# Altium PCB PCB_JK-BLDC-Encoder-Calibrator-Tester4_2023-05-02.pcbdoc
Units mm, origin at the board's own origin, x right, y up, seen from the top; angles counter-clockwise.
Board outline 118.08 x 76.87 mm, 2 copper layers (Top Layer, Bottom Layer); 17 components, 64 nets, 153 pads, 5 vias.
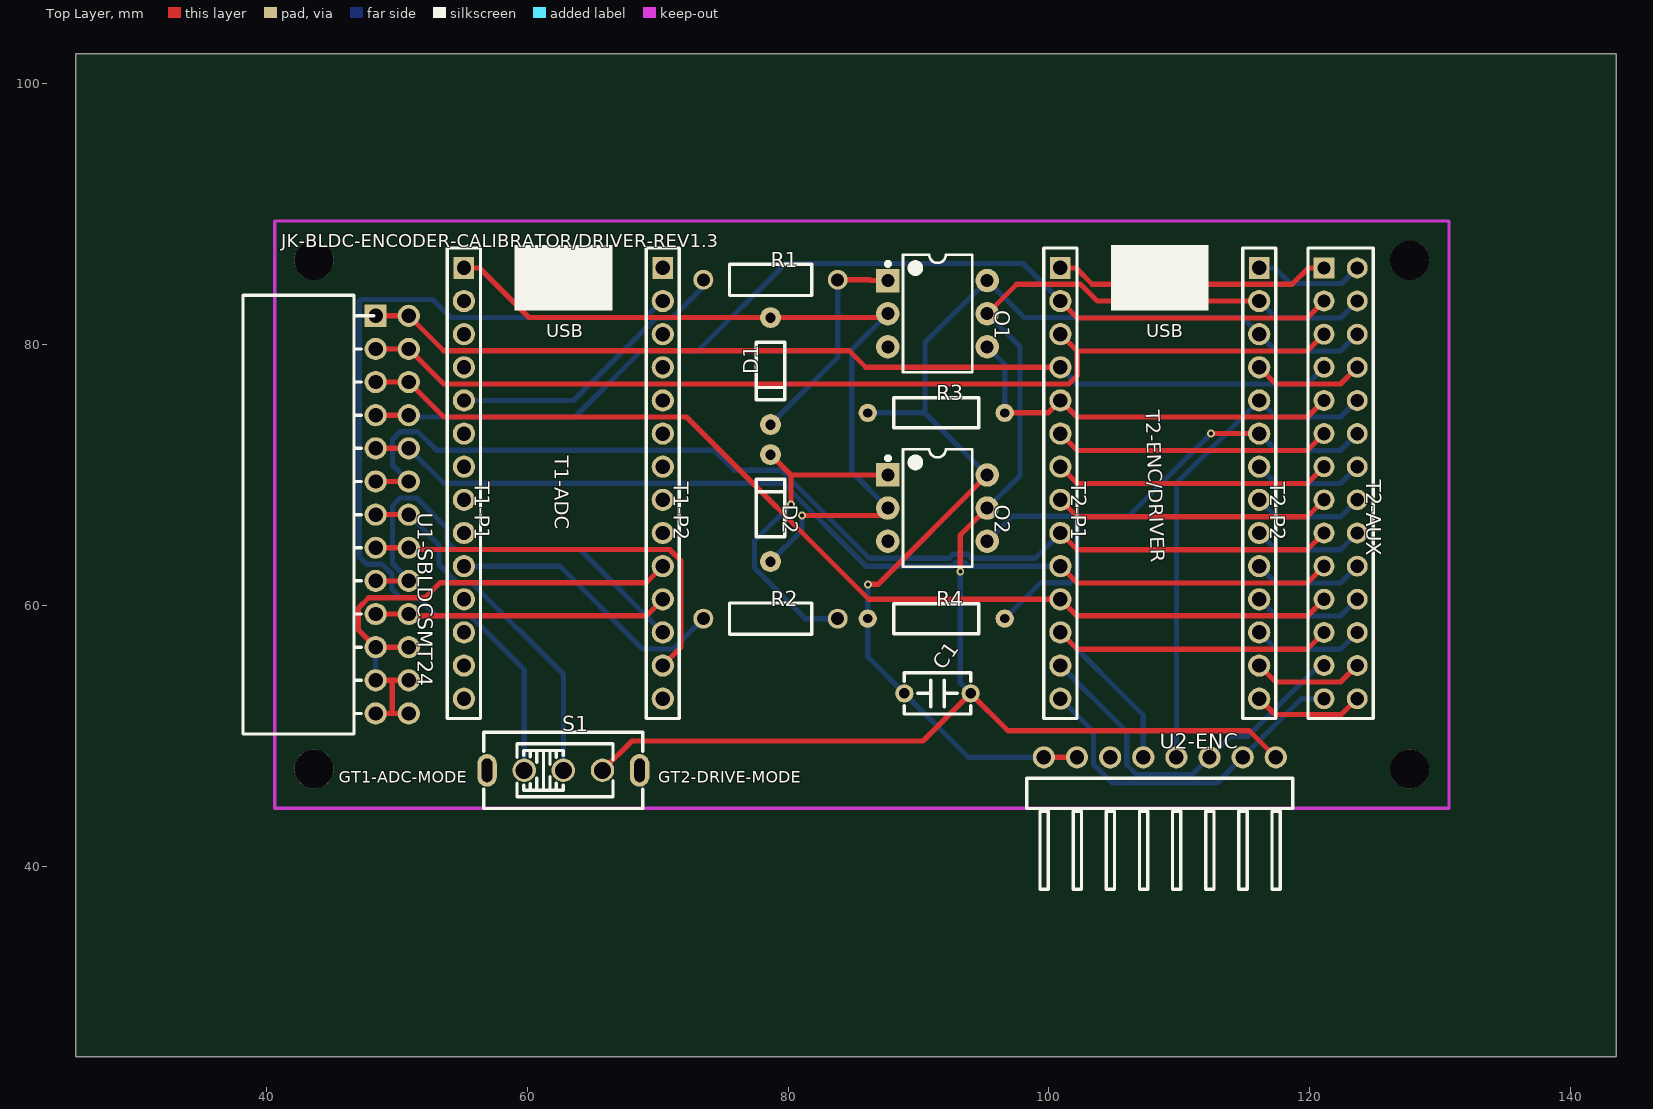
[diagram p0: Top Layer view]
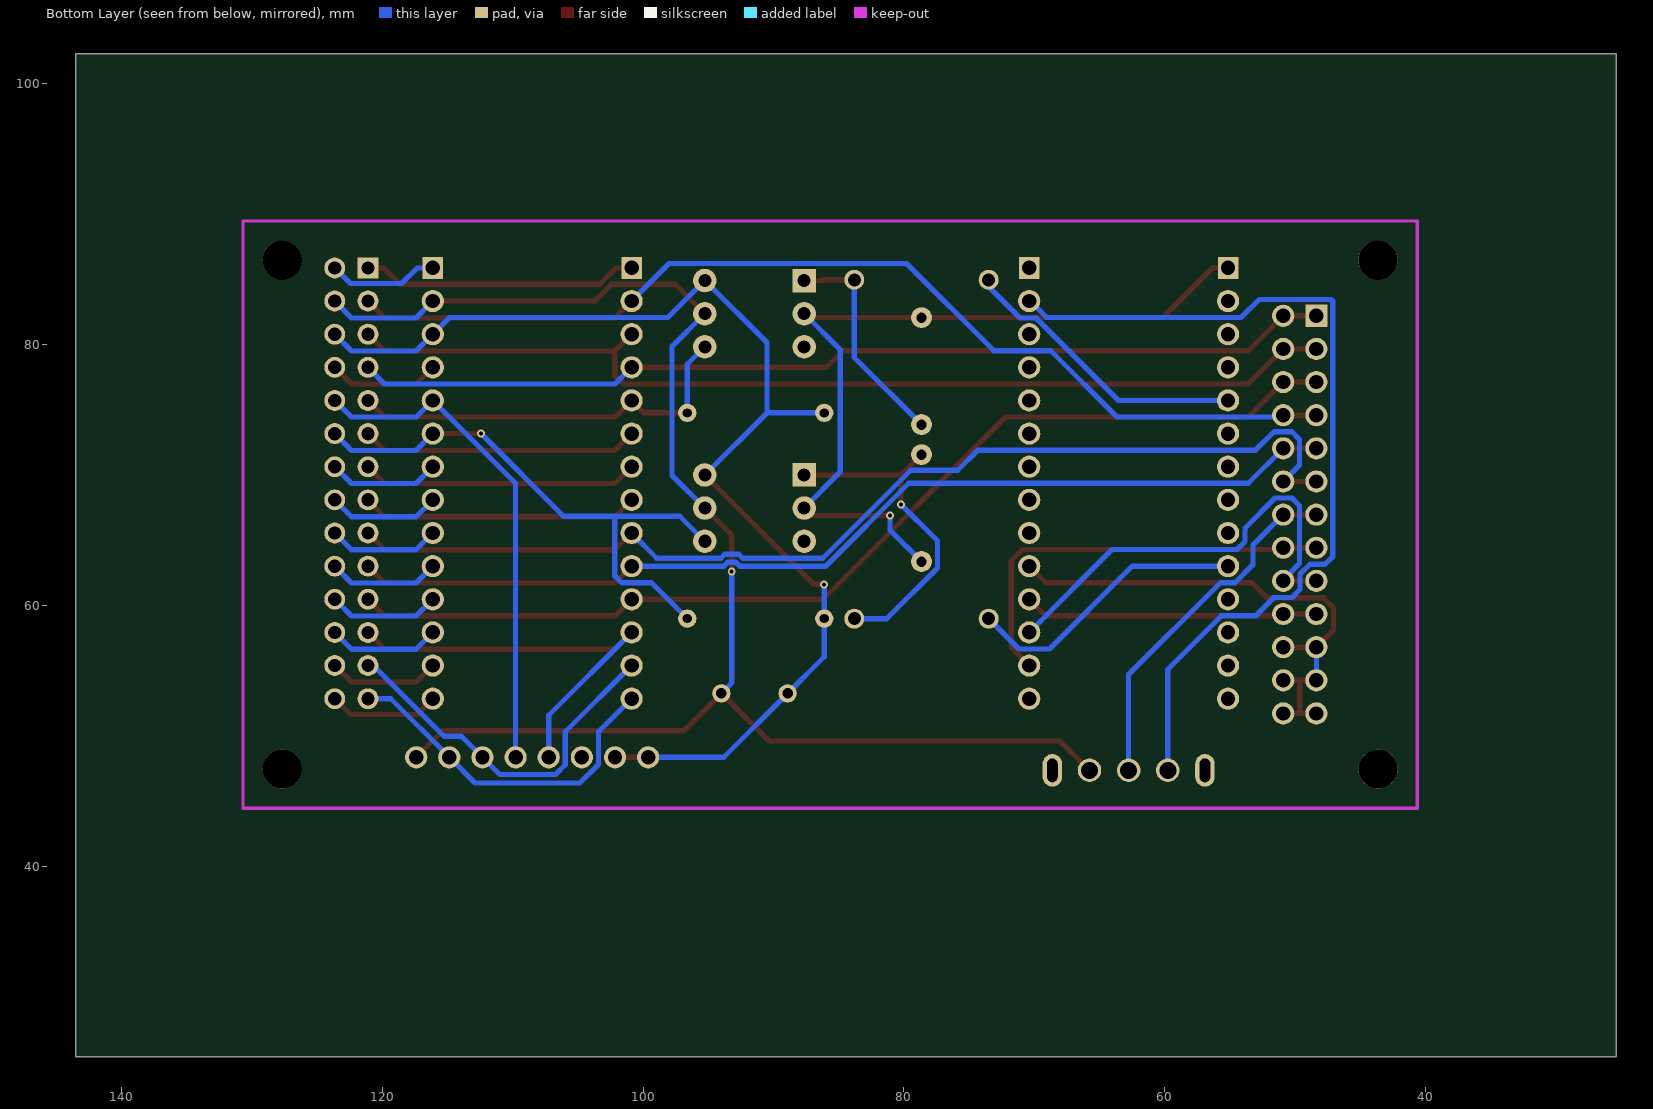
[diagram p1: Bottom Layer view, seen from below]

## Layer stack, top to bottom
Top Layer: signal copper (thickness not stored)
Dielectric: dielectric 0.32, FR-4, Dk 4.8
Bottom Layer: signal copper (thickness not stored)

## Board outline
143.484,25.4 25.4,25.4 25.4,102.271 143.484,102.271

## Components (designator, comment, footprint, x,y, rotation, side; value= is the part's Value field where it differs from the comment)
C1 "100nF" CAP-TH_L5.0-W2.5-P5.08-D0.7 91.457,53.244 r0 top
D1 "1N914BTR" DO-35_BD2.0-L4.2-P8.20-D0.5-RD 78.657,77.944 r90 top
D2 "1N914BTR" DO-35_BD2.0-L4.2-P8.20-D0.5-RD 78.657,67.444 r270 top
O1 "H11L1" DIP-6_L8.5-W6.4-P2.54-LS7.6-BL 91.457,82.344 r270 top
O2 "H11L1" DIP-6_L8.5-W6.4-P2.54-LS7.6-BL 91.457,67.444 r270 top
R1 "220" RES-TH_BD2.4-L6.3-P10.30-D0.6 78.657,84.944 r0 top
R2 "220" RES-TH_BD2.4-L6.3-P10.30-D0.6 78.657,58.969 r0 top
R3 "1kΩ" RES-TH_BD2.3-L6.5-P10.50-D0.5 91.357,74.744 r0 top
R4 "1kΩ" RES-TH_BD2.3-L6.5-P10.50-D0.5 91.357,58.969 r0 top
S1 "SS-12F44-G5_C2998807" SW-TH_SS-12F44-G5_C2998807 62.777,47.344 r0 top
T1-P1 "PM254-1-14-Z-8.5" HDR-TH_14P-P2.54-V-F-1 55.157,69.344 r270 top
T1-P2 "PM254-1-14-Z-8.5" HDR-TH_14P-P2.54-V-F-1 70.397,69.344 r270 top
T2-AUX "PM254-2-14-Z-8.5" HDR-TH_28P-P2.54-V-F-R2-C14-S2.54-1 122.357,69.344 r270 top
T2-P1 "PM254-1-14-Z-8.5" HDR-TH_14P-P2.54-V-F-1 100.877,69.344 r270 top
T2-P2 "PM254-1-14-Z-8.5" HDR-TH_14P-P2.54-V-F-1 116.117,69.344 r270 top
U1-SBLDCSMT24 "PM254-2-13-W-8.5" HDR-TH_26P-P2.54-H-F-R2-C13-W8.5 49.657,66.944 r270 top
U2-ENC "PZ254-1-08-W-8.5" HDR-TH_08P-P2.54-H-M-W10.4-N 108.497,48.344 r0 top

## Footprints (in the part's own frame and the unit in brackets; to place one, negate y for a bottom-side part, rotate by r counter-clockwise, add the part's x,y. Pads: shape width x height; smd on the part's side, far side on the other; paste and mask are expansions set on the pad)
CAP-TH_L5.0-W2.5-P5.08-D0.7 [mm]
  round 1.4 hole 0.8: 1(-2.54,0) 2(2.54,0)
  silkscreen extent -2.54,-1.59 2.54,1.59
DIP-6_L8.5-W6.4-P2.54-LS7.6-BL [mm]
  rect 1.8x1.8 hole 1: 1(-2.54,-3.81)
  round 1.8 hole 1: 2(0,-3.81) 3(2.54,-3.81) 4(2.54,3.81) 5(0,3.81) 6(-2.54,3.81)
  silkscreen extent -4.52,-3.95 4.5,2.65
DO-35_BD2.0-L4.2-P8.20-D0.5-RD [mm]
  round 1.6 hole 0.8: 1(-4.1,0) 2(4.1,0)
  silkscreen extent -2.2,-1.1 2.2,1.1
HDR-TH_08P-P2.54-H-M-W10.4-N [mm]
  round 1.7 hole 1.1: 1(-8.89,0) 2(-6.35,0) 3(-3.81,0) 4(-1.27,0) 5(1.27,0) 6(3.81,0) 7(6.35,0) 8(8.89,0)
  silkscreen extent -10.2,-10.12 10.2,-1.62
HDR-TH_14P-P2.54-V-F-1 [mm]
  rect 1.7x1.575 hole 1.1: 1(-16.51,0)
  round 1.7 hole 1.1: 2(-13.97,0) 3(-11.43,0) 4(-8.89,0) 5(-6.35,0) 6(-3.81,0) 7(-1.27,0) 8(1.27,0) 9(3.81,0) 10(6.35,0) 11(8.89,0) 12(11.43,0) 13(13.97,0) 14(16.51,0)
  silkscreen extent -18.03,-1.27 18.03,1.27
HDR-TH_26P-P2.54-H-F-R2-C13-W8.5 [mm]
  rect 1.7x1.7 hole 1.1: 1(-15.24,-1.27)
  round 1.7 hole 1.1: 2(-15.24,1.27) 3(-12.7,-1.27) 4(-12.7,1.27) 5(-10.16,-1.27) 6(-10.16,1.27) 7(-7.62,-1.27) 8(-7.62,1.27) 9(-5.08,-1.27) 10(-5.08,1.27) 11(-2.54,-1.27) 12(-2.54,1.27) 13(0,-1.27) 14(0,1.27) 15(2.54,-1.27) 16(2.54,1.27) 17(5.08,-1.27) 18(5.08,1.27) 19(7.62,-1.27) 20(7.62,1.27) 21(10.16,-1.27) 22(10.16,1.27) 23(12.7,-1.27) 24(12.7,1.27) 25(15.24,-1.27) 26(15.24,1.27)
  silkscreen extent -16.81,-11.43 16.81,-1.4
HDR-TH_28P-P2.54-V-F-R2-C14-S2.54-1 [mm]
  rect 1.6x1.6 hole 1.02: 1(-16.51,-1.27)
  round 1.6 hole 1.02: 2(-16.51,1.27) 3(-13.97,-1.27) 4(-13.97,1.27) 5(-11.43,-1.27) 6(-11.43,1.27) 7(-8.89,-1.27) 8(-8.89,1.27) 9(-6.35,-1.27) 10(-6.35,1.27) 11(-3.81,-1.27) 12(-3.81,1.27) 13(-1.27,-1.27) 14(-1.27,1.27) 15(1.27,-1.27) 16(1.27,1.27) 17(3.81,-1.27) 18(3.81,1.27) 19(6.35,-1.27) 20(6.35,1.27) 21(8.89,-1.27) 22(8.89,1.27) 23(11.43,-1.27) 24(11.43,1.27) 25(13.97,-1.27) 26(13.97,1.27) 27(16.51,-1.27) 28(16.51,1.27)
  silkscreen extent -18.03,-2.5 18.03,2.5
RES-TH_BD2.3-L6.5-P10.50-D0.5 [mm]
  round 1.4 hole 0.7: 1(-5.25,0) 2(5.25,0)
  silkscreen extent -3.25,-1.15 3.25,1.15
RES-TH_BD2.4-L6.3-P10.30-D0.6 [mm]
  round 1.524 hole 1: 1(-5.15,0) 2(5.15,0)
  silkscreen extent -3.15,-1.2 3.15,1.2
SW-TH_SS-12F44-G5_C2998807 [mm]
  round 1.8 hole 1.3: 1(-3,0) 2(0,0) 3(3,0)
  oval 1.5x2.5 hole 0.8 slot 1.8 at 90 deg: 4(5.85,0) 5(-5.85,0)
  silkscreen extent -6.1,-2.92 6.1,2.92

## Free pads (board coordinates)
  round 3 hole 3 unplated: ""(43.657,47.444) ""(43.657,86.444) ""(127.657,47.444) ""(127.657,86.444)

## Via types
v1: diameter 0.61, hole 0.305, Top Layer to Bottom Layer, tented both sides, 5 vias

## Nets (pads, with @x,y where several pads share a name; then routed paths per layer and width w, separated by ;. In a path a pad name is that pad's centre, name@x,y a point inside that pad or via, vN(x,y) a via of type N, cw(c..) or ccw(c..) an arc to the next point about the centre after c; other vN are vias at no path point)
AS5147-XXNC_P3: U2-ENC.3
JK-SBLDC-SMT-REV2.4_P1_03: T1-P2.10 U1-SBLDCSMT24.21 U1-SBLDCSMT24.22 U1-SBLDCSMT24.23 U1-SBLDCSMT24.24 U1-SBLDCSMT24.25 U1-SBLDCSMT24.26 | length 40.9
  Top Layer w0.4: U1-SBLDCSMT24.25 49.657,51.704 ; U1-SBLDCSMT24.23 49.657,54.244 ; U1-SBLDCSMT24.26 49.657,51.704 ; U1-SBLDCSMT24.24 49.657,54.244 ; U1-SBLDCSMT24.22 U1-SBLDCSMT24.21 47.076,58.095 47.076,59.789 47.863,60.575 52.183,60.575 53.331,61.724 69.127,61.724 T1-P2.10 ; 49.657,51.704 49.657,54.244
  Bottom Layer w0.4: U1-SBLDCSMT24.23 U1-SBLDCSMT24.21
JK-SBLDC-SMT-REV2.4_P1_04: T1-P2.11 U1-SBLDCSMT24.19 U1-SBLDCSMT24.20 | length 22.6
  Top Layer w0.4: U1-SBLDCSMT24.19 U1-SBLDCSMT24.20 51.067,59.184 69.127,59.184 T1-P2.11
JK-SBLDC-SMT-REV2.4_P1_05: T1-P2.12 U1-SBLDCSMT24.17 U1-SBLDCSMT24.18 | length 34.7
  Top Layer w0.4: U1-SBLDCSMT24.17 U1-SBLDCSMT24.18
  Bottom Layer w0.4: U1-SBLDCSMT24.18 50.927,61.943 49.676,63.195 49.676,67.627 50.263,68.214 51.549,68.214 53.868,65.895 53.868,64.865 54.469,64.264 64.047,64.264 T1-P2.12
JK-SBLDC-SMT-REV2.4_P1_06: T1-P2.13 U1-SBLDCSMT24.15 U1-SBLDCSMT24.16 | length 32.4
  Top Layer w0.4: U1-SBLDCSMT24.15 U1-SBLDCSMT24.16 51.067,64.264 70.925,64.264 71.777,63.412 71.777,56.753 T1-P2.13
JK-SBLDC-SMT-REV2.4_P1_07: S1.2 U1-SBLDCSMT24.13 U1-SBLDCSMT24.14 | length 27.7
  Top Layer w0.4: U1-SBLDCSMT24.13 U1-SBLDCSMT24.14
  Bottom Layer w0.4: U1-SBLDCSMT24.14 53.248,64.623 53.248,63.113 54.637,61.724 55.744,61.724 62.777,54.691 S1.2
JK-SBLDC-SMT-REV2.4_P1_08: T2-AUX.17 T2-P1.9 U1-SBLDCSMT24.11 U1-SBLDCSMT24.12 | length 84.1
  Top Layer w0.4: U1-SBLDCSMT24.11 U1-SBLDCSMT24.12 ; T2-P1.9 102.166,64.245 119.798,64.245 T2-AUX.17
  Bottom Layer w0.4: U1-SBLDCSMT24.12 49.676,70.735 49.676,72.707 50.263,73.294 51.633,73.294 53.043,71.884 74.33,71.884 75.872,70.342 79.485,70.342 86.225,63.602 92.36,63.602 92.659,63.902 93.742,63.902 94.041,63.602 98.946,63.602 T2-P1.9
JK-SBLDC-SMT-REV2.4_P1_09: T2-AUX.19 T2-P1.10 U1-SBLDCSMT24.9 U1-SBLDCSMT24.10 | length 77.8
  Top Layer w0.4: U1-SBLDCSMT24.9 U1-SBLDCSMT24.10 ; T2-P1.10 102.166,61.705 119.798,61.705 T2-AUX.19
  Bottom Layer w0.4: U1-SBLDCSMT24.10 53.607,69.344 79.633,69.344 85.983,62.994 92.602,62.994 92.908,63.3 93.493,63.3 93.8,62.994 T2-P1.10
JK-SBLDC-SMT-REV2.4_P1_10: T2-AUX.3 T2-P1.2 U1-SBLDCSMT24.7 U1-SBLDCSMT24.8 | length 79.9
  Top Layer w0.4: U1-SBLDCSMT24.7 U1-SBLDCSMT24.8 ; T2-P1.2 102.166,82.025 119.798,82.025 T2-AUX.3
  Bottom Layer w0.4: U1-SBLDCSMT24.8 51.067,74.424 63.673,74.424 68.753,79.504 73.109,79.504 79.792,86.187 98.004,86.187 T2-P1.2
JK-SBLDC-SMT-REV2.4_P1_11: T2-AUX.21 T2-P1.11 U1-SBLDCSMT24.5 U1-SBLDCSMT24.6 | length 80.6
  Top Layer w0.4: U1-SBLDCSMT24.5 U1-SBLDCSMT24.6 53.607,74.424 72.21,74.424 86.18,60.454 T2-P1.11 102.147,59.184 119.817,59.184 T2-AUX.21
JK-SBLDC-SMT-REV2.4_P1_12: T2-AUX.5 T2-P1.3 U1-SBLDCSMT24.3 U1-SBLDCSMT24.4 | length 78.3
  Top Layer w0.4: U1-SBLDCSMT24.3 U1-SBLDCSMT24.4 53.607,76.964 101.518,76.964 102.166,77.611 102.166,79.485 ; T2-P1.3 102.166,79.485 ; T2-AUX.5 119.798,79.485 102.166,79.485
JK-SBLDC-SMT-REV2.4_P1_13: T2-AUX.7 T2-P1.4 U1-SBLDCSMT24.1 U1-SBLDCSMT24.2 | length 75.4
  Top Layer w0.4: U1-SBLDCSMT24.1 U1-SBLDCSMT24.2 53.607,79.504 84.685,79.504 85.955,78.234 T2-P1.4
  Bottom Layer w0.4: T2-P1.4 102.147,76.964 119.817,76.964 T2-AUX.7
O1_1: D1.1 O1.1 R1.2 | length 17.1
  Top Layer w0.4: R1.2 86.286,84.944 86.346,84.884 O1.1
  Bottom Layer w0.4: D1.1 83.807,78.994 R1.2
O1_3: O1.3
O2_1: D2.1 O2.1 R2.2 | length 25.9
  Top Layer w0.4: D2.1 80.217,69.984 ; v1(80.217,67.731) 80.217,69.984 ; O2.1 86.496,69.984 80.217,69.984
  Bottom Layer w0.4: v1(80.217,67.731) 77.428,64.942 77.428,62.858 81.317,58.969 R2.2
O2_3: O2.3
S1_4: S1.4
S1_5: S1.5
TEENSY40-T1-ADC-00_P1_02: T1-P1.2
TEENSY40-T1-ADC-01_P1_03: T1-P1.3
TEENSY40-T1-ADC-02_P1_04: T1-P1.4
TEENSY40-T1-ADC-03_P1_05: R1.1 T1-P1.5 | length 22.5
  Bottom Layer w0.4: T1-P1.5 63.548,75.694 69.879,82.025 71.109,82.025 73.507,84.423 R1.1
TEENSY40-T1-ADC-3V_P2_03: T1-P2.3
TEENSY40-T1-ADC-04_P1_06: T1-P1.6
TEENSY40-T1-ADC-05_P1_07: T1-P1.7
TEENSY40-T1-ADC-06_P1_08: T1-P1.8
TEENSY40-T1-ADC-07_P1_09: T1-P1.9
TEENSY40-T1-ADC-08_P1_10: R2.1 T1-P1.10 | length 21.9
  Bottom Layer w0.4: T1-P1.10 62.495,62.994 68.845,56.644 71.182,56.644 R2.1
TEENSY40-T1-ADC-09_P1_11: T1-P1.11
TEENSY40-T1-ADC-10_P1_12: T1-P1.12
TEENSY40-T1-ADC-11_P1_13: T1-P1.13
TEENSY40-T1-ADC-12_P1_14: T1-P1.14
TEENSY40-T1-ADC-13_P2_14: T1-P2.14
TEENSY40-T1-ADC-18_P2_09: T1-P2.9
TEENSY40-T1-ADC-19_P2_08: T1-P2.8
TEENSY40-T1-ADC-20_P2_07: T1-P2.7
TEENSY40-T1-ADC-21_P2_06: T1-P2.6
TEENSY40-T1-ADC-22_P2_05: T1-P2.5
TEENSY40-T1-ADC-23_P2_04: T1-P2.4
TEENSY40-T1-ADC-GG_P1_01: D1.2 D2.2 O1.2 O2.2 T1-P1.1 | length 62.7
  Top Layer w0.4: T1-P1.1 56.345,85.854 60.155,82.044 D1.2 87.347,82.044 O1.2 ; v1(81.065,66.877) 87.08,66.877 O2.2
  Bottom Layer w0.4: D2.2@78.657,63.344 81.065,65.751 v1(81.065,66.877) ; O2.2 84.891,70.2 84.891,79.587 O1.2
TEENSY40-T1-ADC-GG_P2_02: S1.1 T1-P2.2 | length 68.7
  Bottom Layer w0.4: S1.1 59.777,55.082 55.675,59.184 53.043,59.184 51.633,60.594 50.263,60.594 49.638,61.218 49.638,62.382 48.886,63.134 47.721,63.134 47.125,63.73 47.125,83.308 47.252,83.435 52.764,83.435 54.155,82.044 69.048,82.044 70.318,83.314 T1-P2.2
TEENSY40-T1-ADC-VI_P2_01: T1-P2.1
TEENSY40-T2-ENC-03_P1_05: O1.4 R3.2 T2-AUX.9 T2-P1.5 | length 31.5
  Top Layer w0.4: R3.2 99.927,74.744 T2-P1.5 102.147,74.424 119.817,74.424 T2-AUX.9
  Bottom Layer w0.4: O1.4 96.607,78.464 R3.2
TEENSY40-T2-ENC-3V_P2_03: C1.1 O1.6 O2.6 R3.1 R4.1 T2-AUX.6 T2-P2.3 U2-ENC.1 U2-ENC.2 | length 91.8
  Top Layer w0.4: v1(86.112,61.6) 86.883,61.6 O2.6 ; U2-ENC.1 U2-ENC.2
  Bottom Layer w0.4: R3.1 90.507,74.744 ; v1(86.112,61.6) 86.107,61.594 R4.1 86.107,56.054 C1.1 93.817,48.344 U2-ENC.1 ; O2.6 90.507,74.744 ; T2-AUX.6 122.338,79.485 117.405,79.485 T2-P2.3 114.847,82.044 98.107,82.044 O1.6 90.507,80.124 90.507,74.744
TEENSY40-T2-ENC-04_P1_06: T2-AUX.11 T2-P1.6 | length 21.3
  Top Layer w0.4: T2-P1.6 102.166,71.865 119.798,71.865 T2-AUX.11
TEENSY40-T2-ENC-05_P1_07: T2-AUX.13 T2-P1.7 | length 21.3
  Top Layer w0.4: T2-P1.7 102.166,69.325 119.798,69.325 T2-AUX.13
TEENSY40-T2-ENC-06_P1_08: T2-AUX.15 T2-P1.8 | length 21.3
  Top Layer w0.4: T2-P1.8 102.166,66.785 119.798,66.785 T2-AUX.15
TEENSY40-T2-ENC-10_P1_12: T2-AUX.23 T2-P1.12 U2-ENC.4 | length 33.5
  Top Layer w0.4: T2-P1.12 102.166,56.625 119.798,56.625 T2-AUX.23
  Bottom Layer w0.4: T2-P1.12 107.227,51.564 U2-ENC.4
TEENSY40-T2-ENC-11_P1_13: T2-AUX.25 T2-P1.13 U2-ENC.6 | length 28.6
  Bottom Layer w0.4: T2-P1.13 105.957,50.294 105.957,47.765 106.7,47.022 110.986,47.022 U2-ENC.6 113.917,49.954 115.259,49.954 120.679,55.374 T2-AUX.25
TEENSY40-T2-ENC-12_P1_14: T2-AUX.27 T2-P1.14 U2-ENC.7 | length 27
  Bottom Layer w0.4: T2-P1.14 103.417,50.294 103.417,47.798 104.848,46.367 112.87,46.367 U2-ENC.7 119.337,52.834 T2-AUX.27
TEENSY40-T2-ENC-13_P2_14: T2-AUX.28 T2-P2.14 | length 8.5
  Top Layer w0.4: T2-P2.14 117.335,51.616 122.409,51.616 T2-AUX.28
TEENSY40-T2-ENC-14_P2_13: T2-AUX.26 T2-P2.13 | length 8.6
  Top Layer w0.4: T2-P2.13 117.387,54.104 122.357,54.104 T2-AUX.26
TEENSY40-T2-ENC-15_P2_12: T2-AUX.24 T2-P2.12 | length 8.6
  Bottom Layer w0.4: T2-P2.12 117.405,56.625 122.338,56.625 T2-AUX.24
TEENSY40-T2-ENC-16_P2_11: T2-AUX.22 T2-P2.11 | length 8.6
  Bottom Layer w0.4: T2-P2.11 117.405,59.165 122.338,59.165 T2-AUX.22
TEENSY40-T2-ENC-17_P2_10: T2-AUX.20 T2-P2.10 | length 8.6
  Bottom Layer w0.4: T2-P2.10 117.405,61.705 122.338,61.705 T2-AUX.20
TEENSY40-T2-ENC-18_P2_09: T2-AUX.18 T2-P2.9 | length 8.6
  Bottom Layer w0.4: T2-P2.9 117.405,64.245 122.338,64.245 T2-AUX.18
TEENSY40-T2-ENC-19_P2_08: T2-AUX.16 T2-P2.8 | length 8.6
  Bottom Layer w0.4: T2-P2.8 117.405,66.785 122.338,66.785 T2-AUX.16
TEENSY40-T2-ENC-20_P2_07: T2-AUX.14 T2-P2.7 | length 8.6
  Bottom Layer w0.4: T2-P2.7 117.405,69.325 122.338,69.325 T2-AUX.14
TEENSY40-T2-ENC-21_P2_06: O2.4 R4.2 T2-AUX.12 T2-P2.6 | length 44.3
  Top Layer w0.4: v1(112.433,73.154) T2-P2.6
  Bottom Layer w0.4: O2.4 97.185,66.822 102.159,66.822 ; R4.2 99.362,61.724 101.656,61.724 102.159,62.227 102.159,66.822 ; v1(112.433,73.154) 106.101,66.822 102.159,66.822 ; T2-P2.6 117.405,71.865 122.338,71.865 T2-AUX.12
TEENSY40-T2-ENC-22_P2_05: T2-AUX.10 T2-P2.5 U2-ENC.5 | length 38.5
  Bottom Layer w0.4: U2-ENC.5 109.767,69.344 T2-P2.5 117.387,74.424 122.357,74.424 T2-AUX.10
TEENSY40-T2-ENC-23_P2_04: T2-AUX.8 T2-P2.4 | length 8.6
  Top Layer w0.4: T2-P2.4 117.387,76.964 122.357,76.964 T2-AUX.8
TEENSY40-T2-ENC-GG_P1_01: T2-AUX.1 T2-P1.1 | length 21.2
  Top Layer w0.4: T2-P1.1 102.065,85.854 103.317,84.602 118.635,84.602 119.886,85.854 T2-AUX.1
TEENSY40-T2-ENC-GG_P2_02: C1.2 O1.5 O2.5 S1.3 T2-AUX.4 T2-P2.2 U2-ENC.8 | length 119.3
  Top Layer w0.4: S1.3 68.029,49.595 90.348,49.595 C1.2 96.865,50.376 115.355,50.376 U2-ENC.8 ; v1(93.201,62.594) 93.201,65.378 O2.5 ; O1.5 97.526,84.602 102.411,84.602 103.699,83.314 T2-P2.2
  Bottom Layer w0.4: v1(93.201,62.594) 93.201,54.04 C1.2 ; O2.5 97.772,69.949 97.772,79.838 O1.5 ; T2-P2.2 117.405,82.025 122.338,82.025 T2-AUX.4
TEENSY40-T2-ENC-VI_P2_01: T2-AUX.2 T2-P2.1 | length 8.5
  Bottom Layer w0.4: T2-P2.1 117.305,85.854 118.506,84.652 122.425,84.652 T2-AUX.2

## Silkscreen, mask and mechanical layers (free items; w line width, h text height)
Top Overlay:
  rectangle: 59.027,82.594 66.527,87.594
  rectangle: 104.747,82.594 112.247,87.594
  text "JK-BLDC-ENCODER-CALIBRATOR/DRIVER-REV1.3" at 41.157,87.444 h1
  text "USB" at 61.457,80.544 h1
  text "USB" at 107.457,80.544 h1
  text "T2-ENC/DRIVER" at 107.407,74.924 h1.1 r272
  text "T1-ADC" at 62.107,71.444 h1.1 r270
  text "GT1-ADC-MODE" at 45.557,46.394 h0.9
  text "GT2-DRIVE-MODE" at 70.057,46.394 h0.9